# EAGLE board PediPart2 (EAGLE 7.1.0)
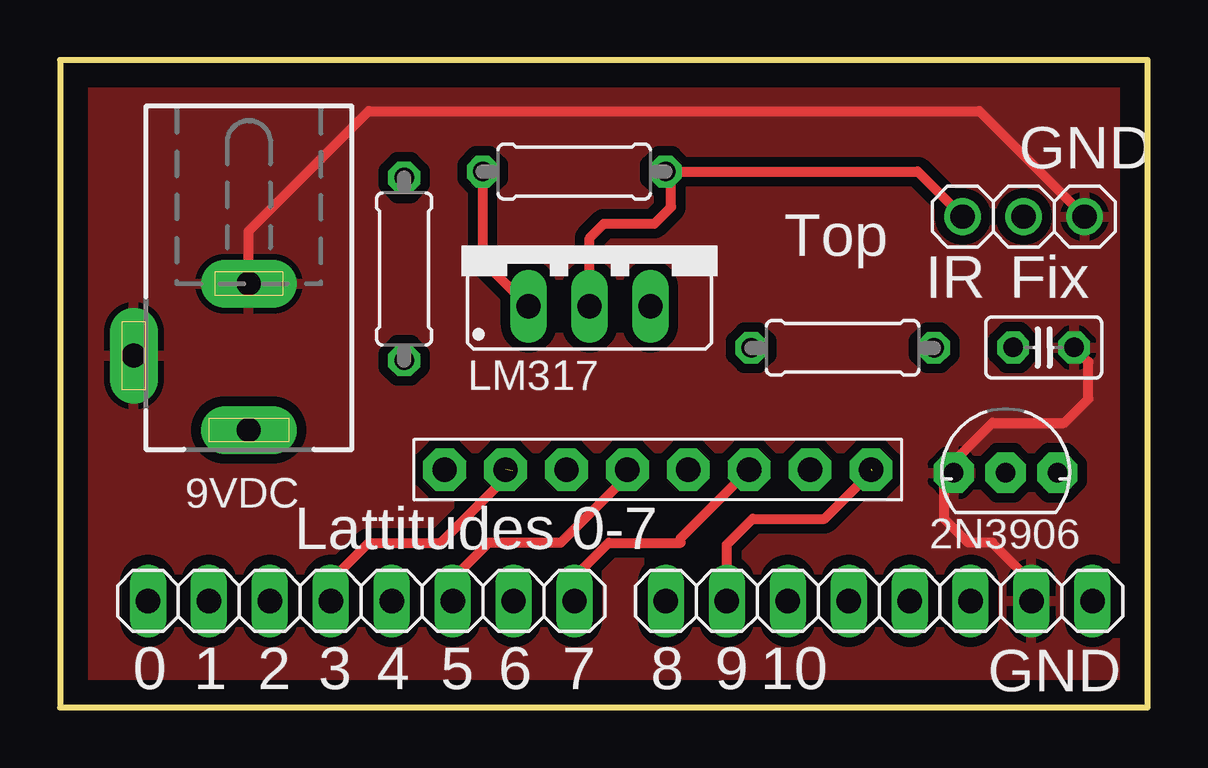
[diagram p0: board, top side]
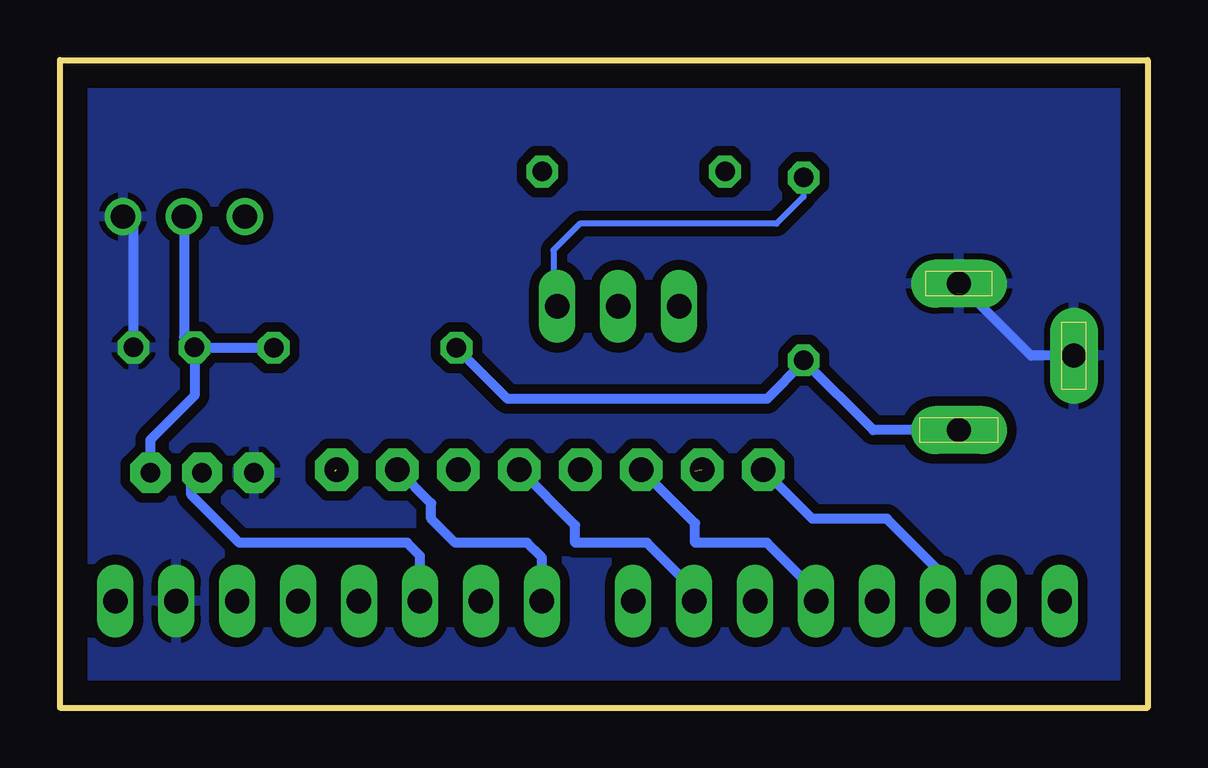
[diagram p1: board, bottom side, seen from below]

Size 45.34 x 27 mm. Coordinates in mm from the lower left corner, seen from the top.
Outline: 45.34,0 0,0 0,27 45.34,27 45.34,0
Copper layers (1*16): Top 0.035mm / dielectric 1.5mm / Bottom 0.035mm
Design rules "default *": minimum track width 8mil, minimum drill 16mil, track to track 8mil, track to pad 8mil, pad to pad 8mil, via to via 10mil, smd to smd 8mil, copper to edge 40mil, drill to drill 12mil, minimum pad ring 10mil, minimum via ring 10mil, stop-mask expansion 4mil, vias tented up to drill 0mil, thermal gap 10mil
Net classes: 0 default: width 0.203 mm, drill 0.406 mm, clearance 0.406 mm; 1 power: width 0.61 mm, drill 0.711 mm, clearance 0.203 mm; 2 gnd: width 0.305 mm, drill 0.711 mm, clearance 0.406 mm; 3 usbvcc: width 0.508 mm, drill 0.711 mm, clearance 0.203 mm

## Footprints (pad centres in the part's own frame; a part is rotated, then mirrored left to right if it is on the bottom)
TO92-INLINE = drill 0.813 pad 1.676 octagon: 1 -2.159,0; 2 0,0; 3 2.159,0
DCJ0202 = drill 1 pad 2 long: 1 0,3.1; 2 4.8,0; 3 0,-3
1X08-BIG = drill 1.016 pad 1.778 octagon: 1 -8.89,0; 2 -6.35,0; 3 -3.81,0; 4 -1.27,0; 5 1.27,0; 6 3.81,0; 7 6.35,0; 8 8.89,0
1X03 = drill 1.016: 1 -2.54,0; 2 0,0; 3 2.54,0
0207/7 = drill 0.813 octagon: 1 -3.81,0; 2 3.81,0
C025-025X050 = drill 0.813 octagon: 1 -1.27,0; 2 1.27,0
78XXS = drill 1.016 long: GND 0,-2.54; IN -2.54,-2.54; OUT 2.54,-2.54
1X08 = drill 1.016 long: 1 -8.89,0; 2 -6.35,0; 3 -3.81,0; 4 -1.27,0; 5 1.27,0; 6 3.81,0; 7 6.35,0; 8 8.89,0

## Placement (x,y rotation side)
2N3906  [TO92-INLINE]  39.42,9.79 0 top
9VDC  [DCJ0202]  7.87,14.67 180 top
E$1  [1X08-BIG]  24.92,9.92 0 top
E$2  [1X03]  40.17,20.47 0 top
E$3  12  [0207/7]  21.43,22.35 0 top
E$4  1K2  [0207/7]  32.62,15 0 top
E$5  470E  [0207/7]  14.35,18.29 90 top
E$6  10pF  [C025-025X050]  41,15.02 0 top
LM317  [78XXS]  22.07,19.27 0 top
PWMH  [1X08]  34.15,4.45 0 top
PWML  [1X08]  12.56,4.45 0 top

## Library data of the parts
2N3906 E$1-E$5 = adafruit
9VDC = con-jack
E$6 = rcl
LM317 = v-reg
PWMH PWML = pinhead

## Nets
AREF: PWMH.8
GND: 2N3906.1 9VDC.2 9VDC.3 E$2.3 E$6.2 PWMH.7
PB6: PWMH.5
PB7: PWMH.6
PE0: PWML.1
PE1: PWML.2
S$1: 9VDC.1 E$4.1 E$5.1
S$2: E$5.2 LM317.OUT
S$3: E$3.1 LM317.IN
S$4: E$2.1 E$3.2 LM317.GND
S$5: 2N3906.3 E$2.2 E$4.2 E$6.1
S$6: 2N3906.2 PWMH.3
S$7: E$1.1 PWML.3
S$8: E$1.2 PWML.4
S$9: E$1.3 PWML.5
S$10: E$1.4 PWML.6
S$11: E$1.5 PWML.7
S$12: E$1.6 PWML.8
S$13: E$1.7 PWMH.1
S$14: E$1.8 PWMH.2

## Tracks (layer width: path | path; a pad name or v marks a point on that pad's centre or on a via)
GND
  Top 0.406: 9VDC.3 7.87,19.87 12.87,24.87 38.31,24.87 E$2.3 | PWMH.7 40.5,5.25 38.87,6.87 37.87,6.87 36.87,7.87 36.87,9.41 2N3906.1 37.26,10.26 38.87,11.87 41.87,11.87 42.87,12.87 42.87,14.42 E$6.2
  Bottom 0.406: 9VDC.2 4.87,14.67 9VDC.3 | E$6.2 42.27,20.04 E$2.3
  pour Top: -0.23,27.27 45.77,27.27 45.77,-0.33 -0.33,-0.33
  pour Bottom: 45.67,27.17 45.67,-0.23 -0.23,-0.23 -0.23,26.97
S$1
  Bottom 0.406: 9VDC.1 11.44,11.57 E$5.1 14.35,14.4 15.87,12.87 26.68,12.87 E$4.1
S$2
  Bottom 0.254: E$5.2 14.35,21.3 15.47,20.17 23.67,20.17 24.77,19.07 24.77,16.89 LM317.OUT
S$3
  Top 0.406: E$3.1 17.62,18.64 LM317.IN
S$4
  Top 0.406: E$2.1 35.75,22.35 E$3.2 25.47,22.12 25.47,20.87 24.77,20.17 22.67,20.17 22.07,19.57 LM317.GND
S$5
  Bottom 0.406: E$4.2 39.74,15 39.87,14.87 39.87,14.88 E$6.1 | E$2.2 40.17,15.46 E$6.1 | E$6.1 39.73,13.01 41.58,11.17 2N3906.3
S$6
  Bottom 0.406: PWMH.3 30.34,6.34 30.87,6.87 37.87,6.87 39.87,8.87 39.87,9.34 2N3906.2
S$7
  Bottom 0.406: PWML.3 8.75,5.75 10.87,7.87 13.98,7.87 E$1.1
S$8  (1 unrouted)
  Top 0.406: PWML.4 11.29,5.29 12.87,6.87 15.87,6.87 18.87,9.87
S$9
  Bottom 0.406: PWML.5 13.83,4.83 15.87,6.87 18.87,6.87 18.87,7.68 E$1.3
S$10
  Top 0.406: PWML.6 16.37,5.37 17.87,6.87 20.87,6.87 23.87,9.87 23.82,9.92 E$1.4
S$11
  Bottom 0.406: PWML.7 18.91,4.91 20.87,6.87 23.87,6.87 23.87,7.6 E$1.5
S$12
  Top 0.406: PWML.8 21.45,5.45 22.87,6.87 25.87,6.87 25.87,7.06 E$1.6
S$13
  Bottom 0.406: PWMH.1 25.26,6.26 25.87,6.87 28.87,6.87 29.87,7.87 29.87,8.52 E$1.7
S$14  (1 unrouted)
  Top 0.406: PWMH.2 27.8,6.8 28.87,7.87 31.87,7.87 33.87,9.87

## Text on the board
tNames: GND | Top | IR | Fix | Lattitudes 0-7 | 0 | 1 | 2 | 3 | 4 | 5 | 6 | 7 | 8 | 9 | 10 | GND